# Altium PCB PCB.PcbDoc (part 2 of 2)
Units mil, origin at the board's own origin, x right, y up, seen from the top; angles counter-clockwise.
Board outline 3265 x 2770 mil, 2 copper layers (Top Layer, Bottom Layer); 55 components, 72 nets, 277 pads, 54 vias.
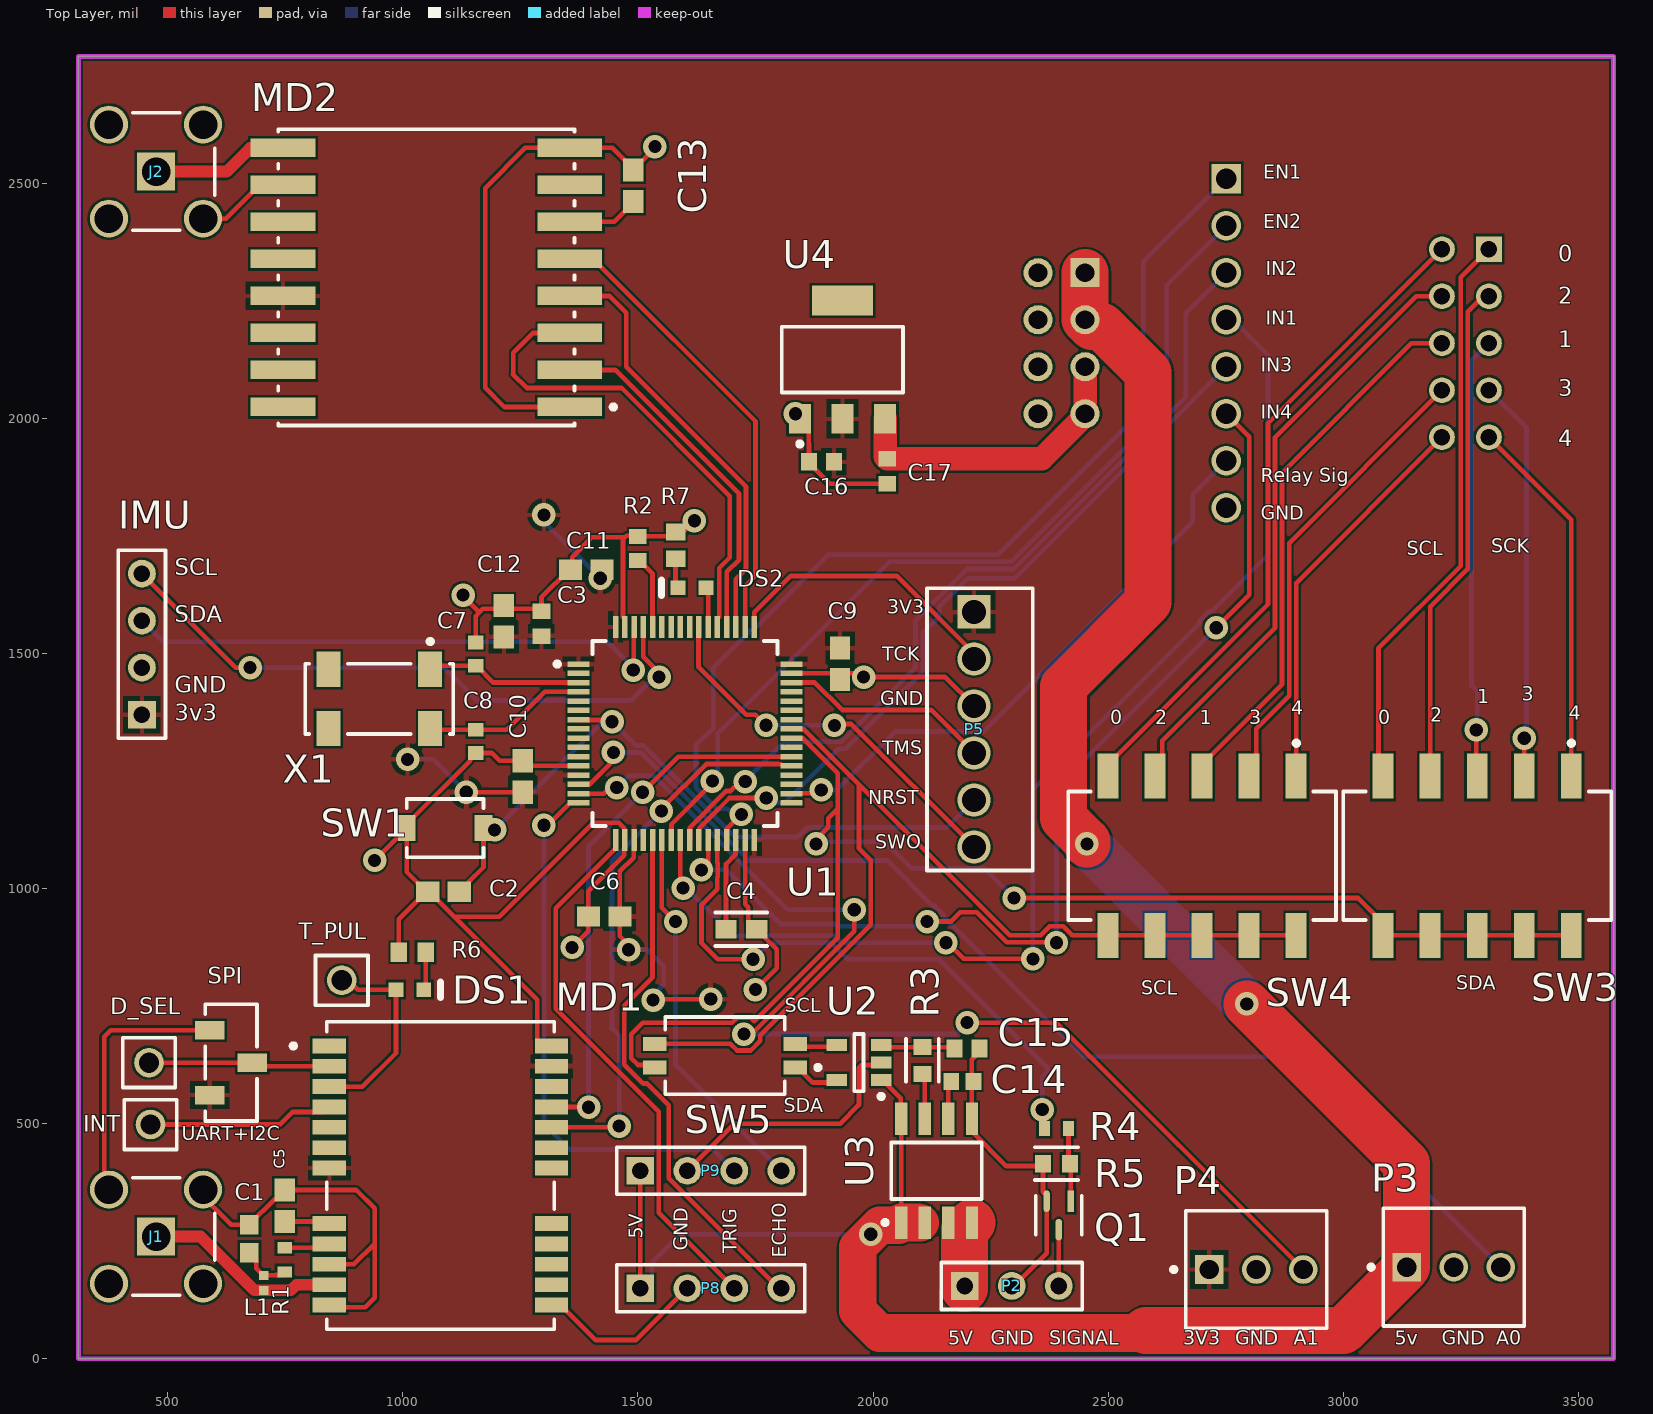
[diagram p0: Top Layer view]

## Via types
v1: diameter 50, hole 28, Top Layer to Bottom Layer, 54 vias

## Nets (pads, with @x,y where several pads share a name; then routed paths per layer and width w, separated by ;. In a path a pad name is that pad's centre, name@x,y a point inside that pad or via, vN(x,y) a via of type N, cw(c..) or ccw(c..) an arc to the next point about the centre after c; other vN are vias at no path point) (continued)
TMS: (continued)
  Top Layer w10: U1.46 1876.33,1438.27 1934.6,1380 2123.46,1380 P5.4
Trig1: P8.3 U1.17 | length 1163.8
  Top Layer w10: U1.17 1452.36,1085.91 1325,958.54 1325,745 1544.53,525.47 1544.53,310.47 P8.3
Trig2: P9.3 U1.16 | length 1174.7
  Top Layer w10: v1(1300,1135) 1308.54,1135 1355.91,1182.36 U1.16
  Bottom Layer w10: v1(1300,1135) 1300,500 1355,445 1660,445 P9.3
USART1_RX: U1.43
USART1_TX: U1.42
USART6_RX: MD1.21 U1.38 | length 1146.7
  Top Layer w10: MD1.21 1380.67,535.67 1383.36,538.36 1391.64,538.36 v1(1395,535) ; v1(1510,1205) 1585.79,1280.79 U1.38
  Bottom Layer w10: v1(1395,535) 1395,1090 v1(1510,1205)
USART6_TX: MD1.20 U1.37 | length 1186.9
  Top Layer w10: MD1.20 1457.36,492.36 v1(1460,495) ; v1(1550,1165) 1550,1170 1645,1265 1798.5,1265 1798.61,1264.88 1804.88,1264.88 1808.66,1261.1 U1.37
  Bottom Layer w10: v1(1460,495) 1460,687.66 1445,702.66 1445,1060 v1(1550,1165)
VCC_RF: MD1.9 R1.1 | length 98.4
  Top Layer w10: R1.1 835.64,236.19 MD1.9
pads on no net: MD1.1 MD1.5 MD1.6 MD1.14 MD1.15 MD1.16 MD1.17 MD1.18 MD1.19 MD1.22 MD2.7 MD2.11 MD2.12 MD2.14 MD2.15 MD2.16 U1.2 U1.5 U1.6 U1.11 U1.33 U1.35 U1.36 U1.39 U1.44 U1.45 U1.56 U1.57 U1.58 U1.59 U4.4 X1.2 X1.3

## Polygon pours and split planes (outlines as drawn)
GND on Bottom Layer "GND_L02_P001" (solid, pour order 1): 310,0 3575,0 3575,2770 310,2770
+3V3 on Top Layer "+3V3_L01_P000" (solid, pour order 0): 310,0 3575,0 3575,2770 310,2770

## Keep-outs
Top Layer:
  lines w10: 310,0 310,2770
Keep-Out Layer:
  lines w10: 310,0 3575,0 3575,2770 310,2770

## Silkscreen, mask and mechanical layers (free items; w line width, h text height)
Top Overlay:
  text "EN1" at 2830,2500 h50
  text "EN2" at 2830,2395 h50
  text "0" at 3457,2322 h60
  text "IN2" at 2835,2295 h50
  text "2" at 3457,2232 h60
  text "IN1" at 2835,2190 h50
  text "1" at 3457,2140 h60
  text "IN3" at 2825,2090 h50
  text "3" at 3457,2036 h60
  text "IN4" at 2825,1990 h50
  text "4" at 3457,1929 h60
  text "Relay Sig" at 2825,1855 h50
  text "GND" at 2825,1775 h50
  text "SCK" at 3315,1705 h50
  text "SCL" at 3135,1700 h50
  text "SCL" at 515,1655 h60
  text "3V3" at 2030,1575 h50
  text "SDA" at 515,1555 h60
  text "TCK" at 2020,1475 h50
  text "GND" at 515,1405 h60
  text "3" at 3380,1390 h50
  text "1" at 3285,1385 h50
  text "GND" at 2015,1380 h50
  text "4" at 2890,1360 h50
  text "4" at 3480,1350 h50
  text "3v3" at 515,1345 h60
  text "2" at 3185,1345 h50
  text "0" at 2505,1340 h50
  text "2" at 2600,1340 h50
  text "1" at 2695,1340 h50
  text "3" at 2800,1340 h50
  text "0" at 3075,1340 h50
  text "TMS" at 2020,1275 h50
  text "NRST" at 1990,1170 h50
  text "SWO" at 2005,1075 h50
  text "SDA" at 3240,775 h50
  text "SCL" at 2570,765 h50
  text "SCL" at 1811.97,727.09 h50
  text "SDA" at 1810,515 h50
  text "UART+I2C" at 530,455 h50
  text "5V" at 1520,255 h50 r90
  text "GND" at 1615,230 h50 r90
  text "TRIG" at 1720,225 h50 r90
  text "ECHO" at 1825,215 h50 r90
  text "5V" at 2160,20 h50
  text "GND" at 2250,20 h50
  text "SIGNAL" at 2375,20 h50
  text "3V3" at 2660,20 h50
  text "GND" at 2770,20 h50
  text "A1" at 2895,20 h50
  text "5v" at 3110,20 h50
  text "GND" at 3210,20 h50
  text "A0" at 3325,20 h50

## Dimensions
3575,2770 to 3575,0 on Mechanical 1
310,2770 to 3575,2770 on Mechanical 1

## Text inside footprints (layer, text, board x,y; h text height)
P7: Bottom Overlay "8" at 2684.21,1824.96 h40 r90; Bottom Overlay "1" at 2684.21,2514.72 h40 r90